# EAGLE board con_zylox (EAGLE 7.2.0)
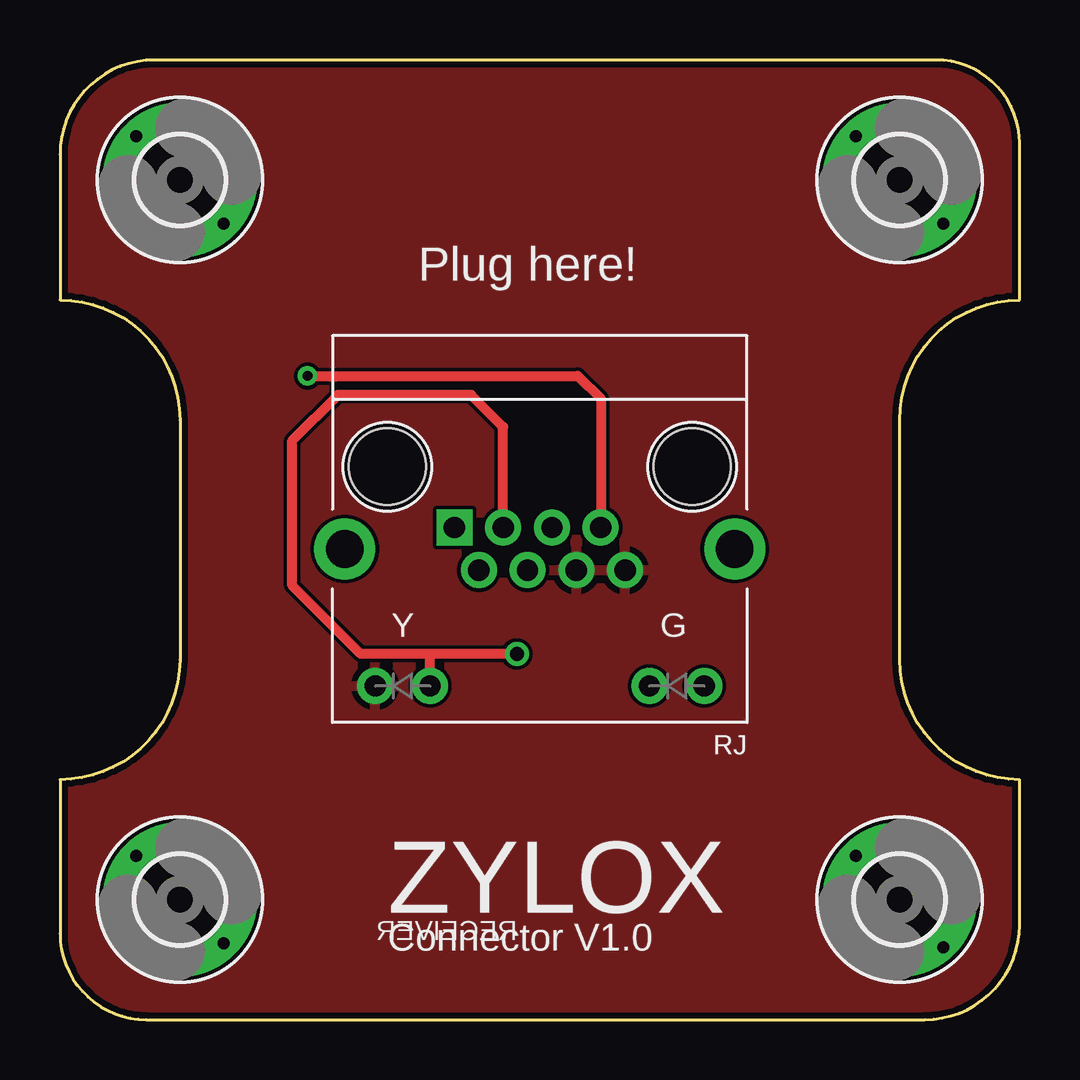
[diagram p0: board, top side]
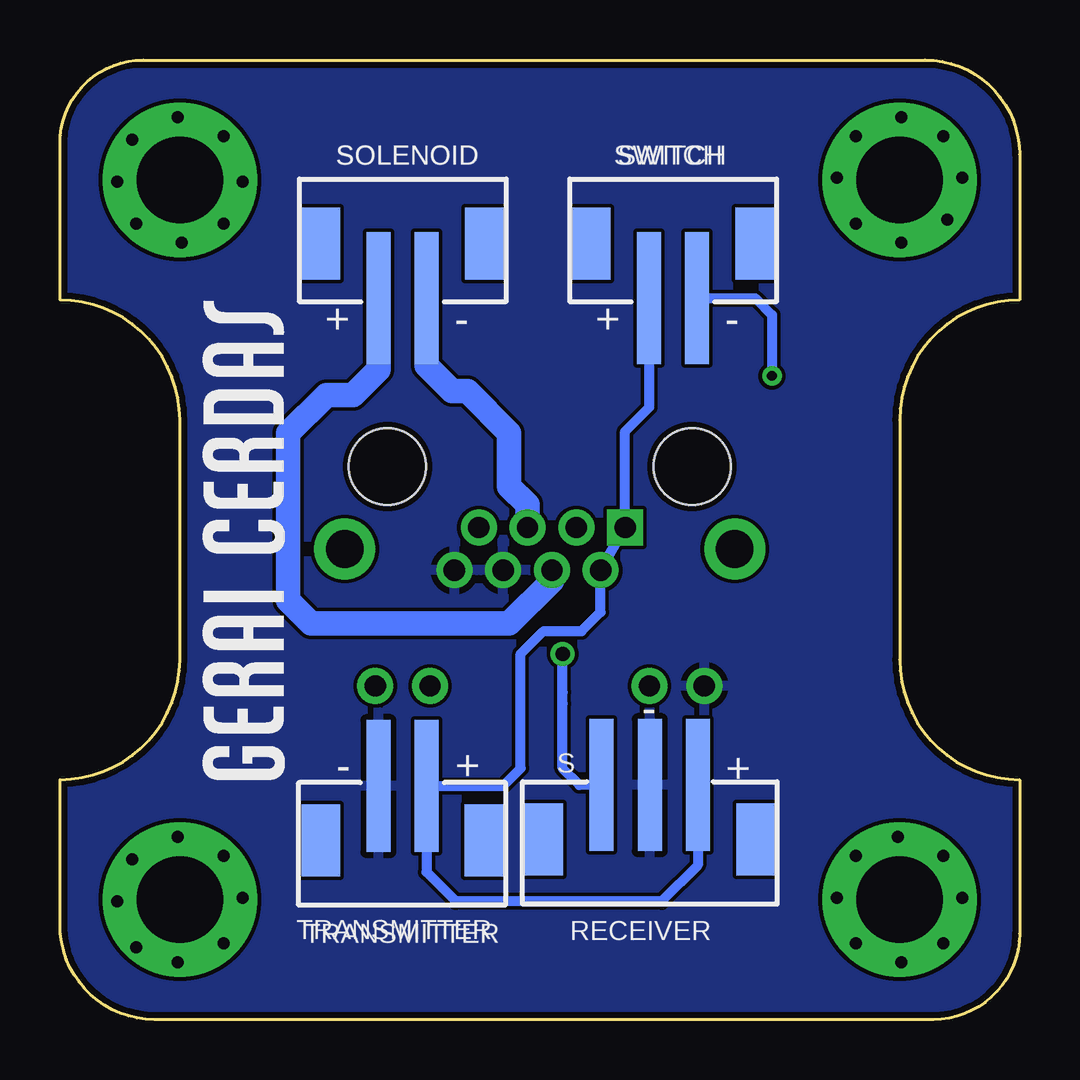
[diagram p1: board, bottom side, seen from below]

Size 40 x 40 mm. Coordinates in mm from the lower left corner, seen from the top.
Outline: 40,3.94 40,10 arc-90 35,15 35,25 arc-90 40,30 40,36.52 arc90 36.52,40 3.94,40 arc90 0,36.06 0,30 arc-90 5,25 5,15 arc-90 0,10 0,3.59 arc90 3.59,0 36.06,0 arc90 40,3.94
Copper layers (1*16): Top 0.035mm / dielectric 1.5mm / Bottom 0.035mm
Design rules "DFRobot_Eagle_Rule_v0.4": minimum track width 6mil, minimum drill 12mil, track to track 6mil, track to pad 6mil, pad to pad 6mil, via to via 6mil, smd to smd 0mil, copper to edge 10mil, drill to drill 10mil, minimum pad ring 12mil, minimum via ring 8mil, stop-mask expansion 2mil, vias tented up to drill 25mil, thermal gap 10mil

## Footprints (pad centres in the part's own frame; a part is rotated, then mirrored left to right if it is on the bottom)
HOLES-3M6-PAD = drill 3.6 pad 6.452: B3,6 0,0
JST-PH2-3P-SMD-VERT = smd 1 x 5.5: 1 -1.992,-3.111; 2 0.008,-3.111; 3 2.032,-3.111 | smd 1.6 x 3: NC1 -4.392,-0.841; NC2 4.432,-0.841
RJ45-LED = drill 0.889 square: 1 3.556,-0.508 | drill 0.889: 2 2.54,1.27; 3 1.524,-0.508; 4 0.508,1.27; 5 -0.508,-0.508; 6 -1.524,1.27; 7 -2.54,-0.508; 8 -3.556,1.27; LE1D- 6.858,6.096; LED1+ 4.572,6.096; LED2+ -6.858,6.096; LED2- -4.572,6.096 | drill 1.575 pad 2.54: SHEILD@1 -8.128,0.381; SHIELD@0 8.128,0.381 | hole 3.2: -6.35,-3.048; 6.35,-3.048
JST-PH2-2P-SMD-VERT = smd 1 x 5.5: 1 -1,-2.317; 2 1,-2.317 | smd 1.6 x 3: NC1 -3.4,-0.048; NC2 3.4,-0.048

## Placement (x,y rotation side)
H1  HOLES-PAD-3M6-PAD  [HOLES-3M6-PAD]  5,5 0 top
H2  HOLES-PAD-3M6-PAD  [HOLES-3M6-PAD]  35,5 0 top
H3  HOLES-PAD-3M6-PAD  [HOLES-3M6-PAD]  35,35 0 top
H4  HOLES-PAD-3M6-PAD  [HOLES-3M6-PAD]  5,35 0 top
RECEIVER  [JST-PH2-3P-SMD-VERT]  15.4,6.67 180 bottom
RJ  [RJ45-LED]  20,20 180 top
SOLENOID  [JST-PH2-2P-SMD-VERT]  25.72,32.38 0 bottom
SWITCH  [JST-PH2-2P-SMD-VERT]  14.45,32.38 0 bottom
TRANSMITTER  [JST-PH2-2P-SMD-VERT]  25.73,7.42 180 bottom
U$1  LOGO-TEXT-M  [GC-TEXT-M]  30.64,10 90 bottom

## Library data of the parts
H1-H4 RECEIVER RJ SOLENOID SWITCH TRANSMITTER U$1 = geraicerdas

## Nets
+5V: RECEIVER.1 RJ.1 RJ.2 SWITCH.1 TRANSMITTER.1
GND: RECEIVER.2 RJ.6 RJ.8 RJ.LE1D- TRANSMITTER.2
H1: H1.B3,6
H2: H2.B3,6
H3: H3.B3,6
H4: H4.B3,6
IR: RECEIVER.3 RJ.3 RJ.LED1+
SOLENOID: RJ.5 SOLENOID.2
SW: RJ.7 SWITCH.2
VDD: RJ.4 SOLENOID.1

## Tracks (layer width: path | path; a pad name or v marks a point on that pad's centre or on a via)
+5V
  Bottom 0.406: SWITCH.1 15.45,25.51 16.44,24.51 RJ.1 RJ.2 17.46,16.99 18.26,16.19 19.84,16.19 20.8,15.24 20.8,10.48 21.53,9.74 TRANSMITTER.1 24.73,6.15 23.5,4.92 14.92,4.92 13.41,6.44 RECEIVER.1
GND
  pour Bottom: -0.32,40.16 40.32,40.16 40.32,-0.32 -0.32,-0.32
  pour Top: -0.32,40.48 40.48,40.48 40.48,-0.64 -0.48,-0.64 -0.48,40.48
H1  (via drill 0.5)
  Bottom 0.406: v5.08,7.62 5,7.62 H1.B3,6 | v6.83,6.83 H1.B3,6 | v7.62,5.08 5.08,5.08 H1.B3,6 | v6.83,3.17 H1.B3,6 | v4.92,2.38 4.92,4.92 H1.B3,6 | v3.17,3.17 H1.B3,6 | v2.38,5.08 4.92,5.08 H1.B3,6 | v3.17,6.83 H1.B3,6
H2  (via drill 0.5)
  Bottom 0.406: v35.08,7.62 35,7.62 H2.B3,6 | v36.99,6.67 36.67,6.67 H2.B3,6 | v37.62,4.92 35.08,4.92 H2.B3,6 | v36.83,3.02 36.83,3.17 H2.B3,6 | v35.08,2.38 35.08,4.92 H2.B3,6 | v33.18,3.17 v33.18,3.18 H2.B3,6 | v32.38,5.08 34.92,5.08 H2.B3,6 | v33.18,6.83 v33.18,6.82 H2.B3,6
H3  (via drill 0.5)
  Bottom 0.406: v35.08,37.62 35.08,35.08 H3.B3,6 | v36.99,36.67 36.67,36.67 H3.B3,6 | v37.62,34.92 35.08,34.92 H3.B3,6 | v36.83,33.18 v36.82,33.18 H3.B3,6 | v34.92,32.38 34.92,34.92 | v33.18,33.18 H3.B3,6 | v32.38,34.92 34.92,34.92 | 34.92,34.92 H3.B3,6 | v33.18,36.83 v33.18,36.82 H3.B3,6
H4  (via drill 0.5)
  Bottom 0.406: v4.92,37.62 4.92,35.08 H4.B3,6 | v6.83,36.83 H4.B3,6 | v7.62,35.08 5.08,35.08 H4.B3,6 | v6.83,33.18 v6.82,33.18 H4.B3,6 | v4.92,32.38 4.92,34.92 H4.B3,6 | v3.02,33.34 3.34,33.34 H4.B3,6 | v2.38,35.08 4.92,35.08 H4.B3,6 | v3.17,36.83 H4.B3,6
IR  (via drill 0.6)
  Top 0.406: RJ.3 18.48,24.7 17.14,26.04 11.59,26.04 9.68,24.13 9.68,18.1 12.54,15.24 15.56,15.24 | v19.05,15.24 15.56,15.24 | RJ.LED1+ 15.43,15.11 15.56,15.24
  Bottom 0.406: v19.05,15.24 19.05,13.65 19.05,13.18 19.05,10.48 18.35,9.78 RECEIVER.3
SOLENOID
  Bottom 1.016: RJ.5 20.51,21.46 21.27,22.23 21.27,24.45 23.02,26.19 23.65,26.19 24.72,27.26 24.72,27.46 24.72,27.89 SOLENOID.2
SW  (via drill 0.41)
  Top 0.406: RJ.7 22.54,25.88 21.59,26.83 v10.32,26.83
  Bottom 0.406: SWITCH.2 11.02,30.07 10.32,29.37 v10.32,26.83
VDD
  Bottom 1.016: RJ.4 19.49,18.29 21.27,16.51 29.53,16.51 30.48,17.46 30.48,24.45 28.89,26.04 27.78,26.04 26.72,27.1 SOLENOID.1

## Text on the board
_tNames: Plug here! | RJ | ZYLOX | Connector V1.0
_bNames: SWITCH | SOLENOID | RECEIVER | TRANSMITTER